# Altium PCB TestProj_DDR3.PcbDoc (part 1 of 2)
Units mil, origin at the board's own origin, x right, y up, seen from the top; angles counter-clockwise.
Board outline 6000 x 4000 mil, 4 copper layers (Component Side, Power Plane, Ground Plane, Solder Side), stack 51.034 mil thick; 26 components, 54 nets, 768 pads, 131 vias.
Unrouted connection lines stored in the file: 84.
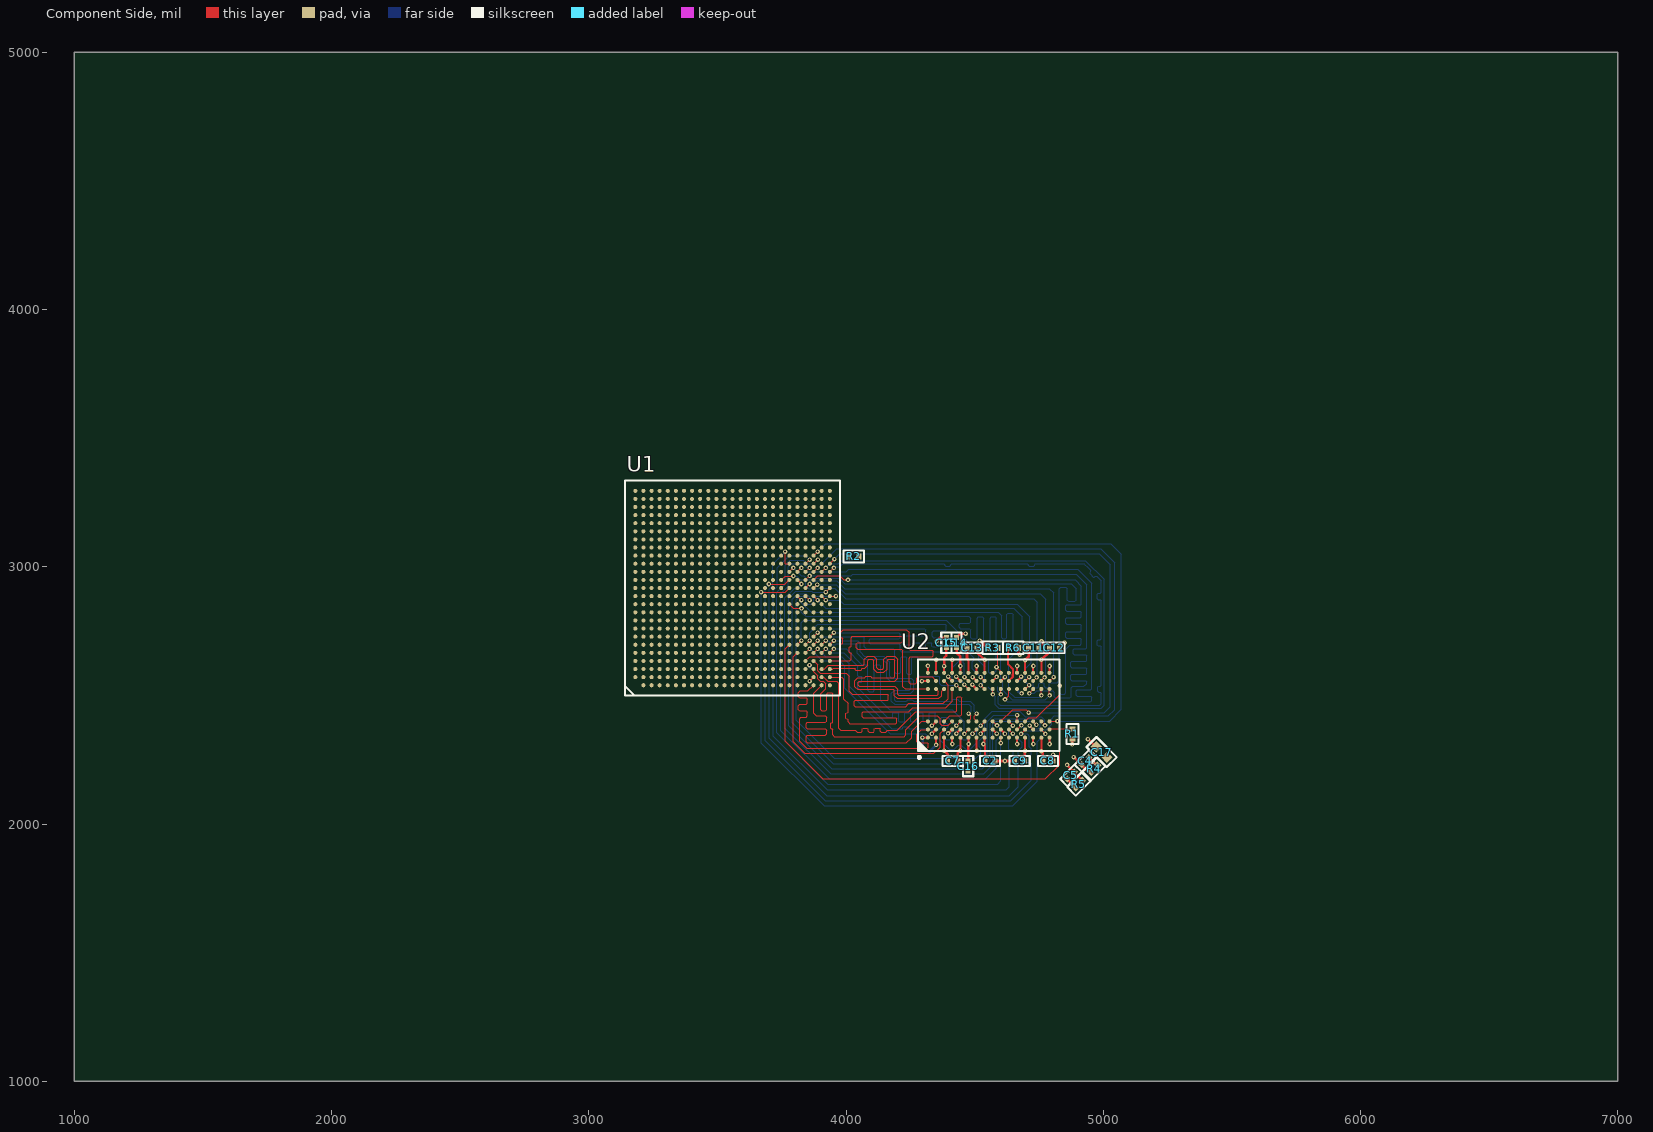
[diagram p0: Component Side view]
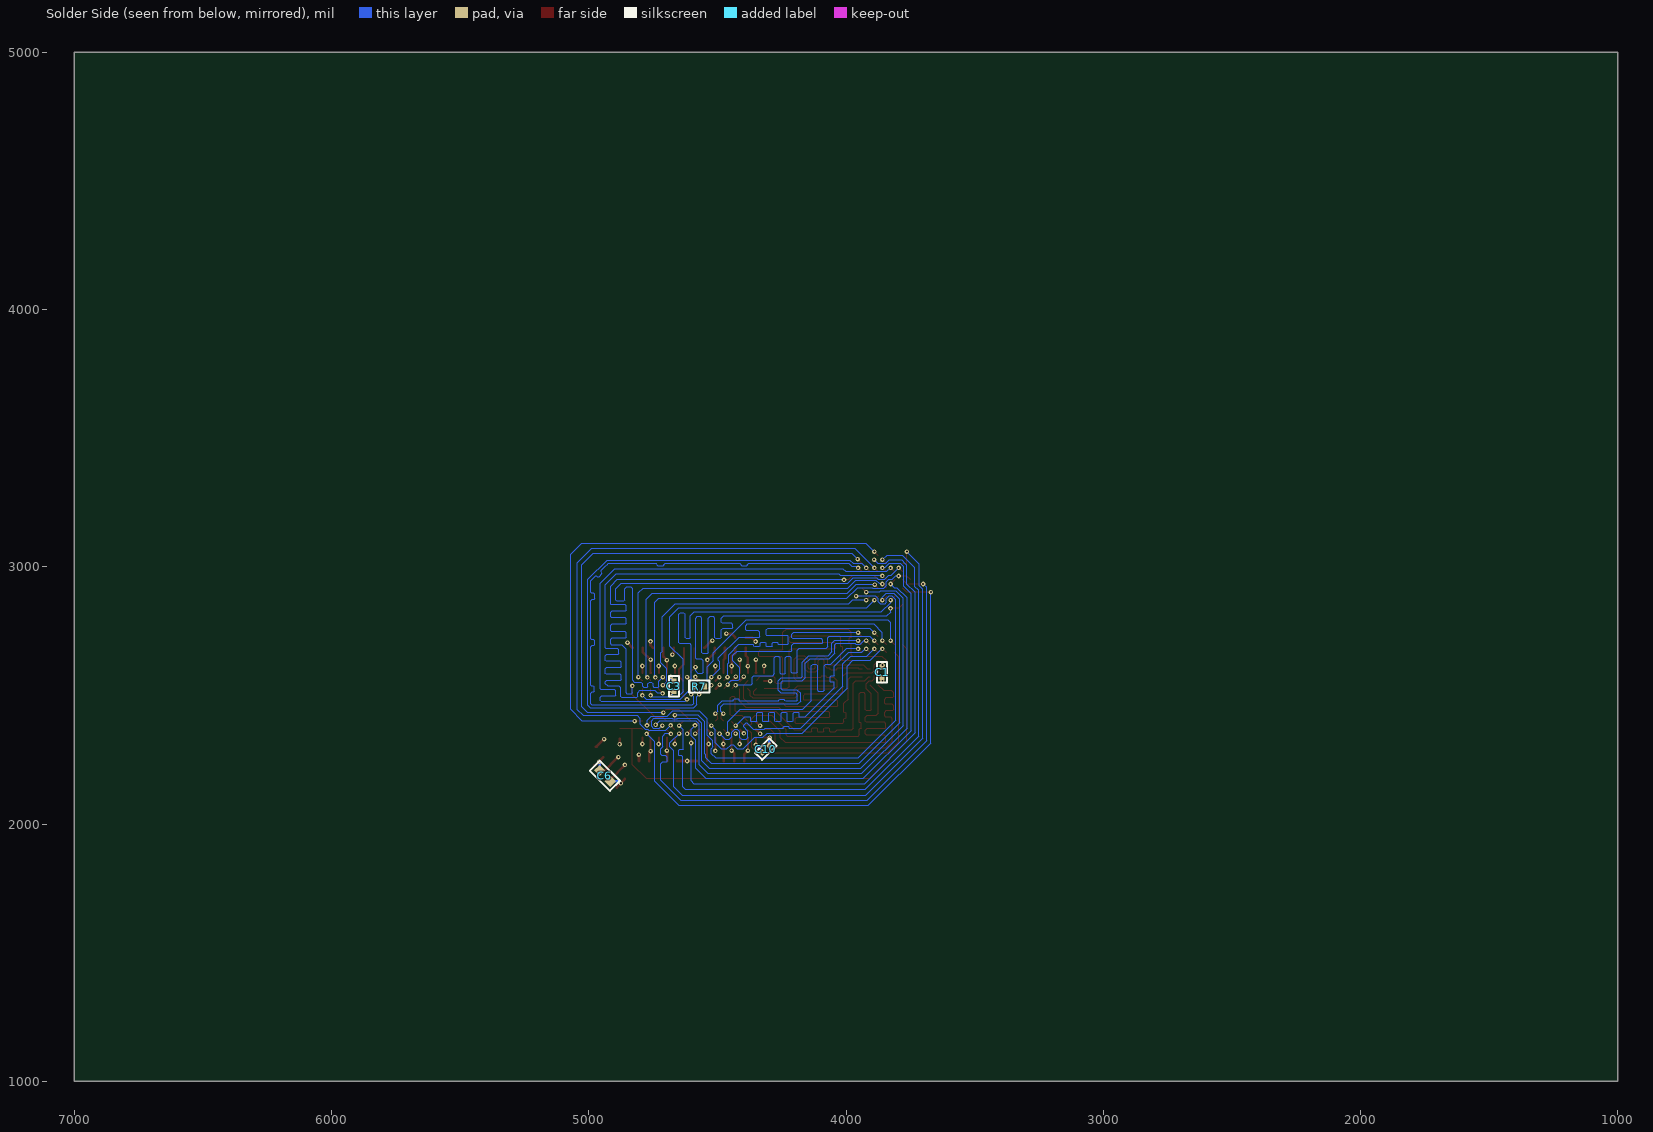
[diagram p1: Solder Side view, seen from below]
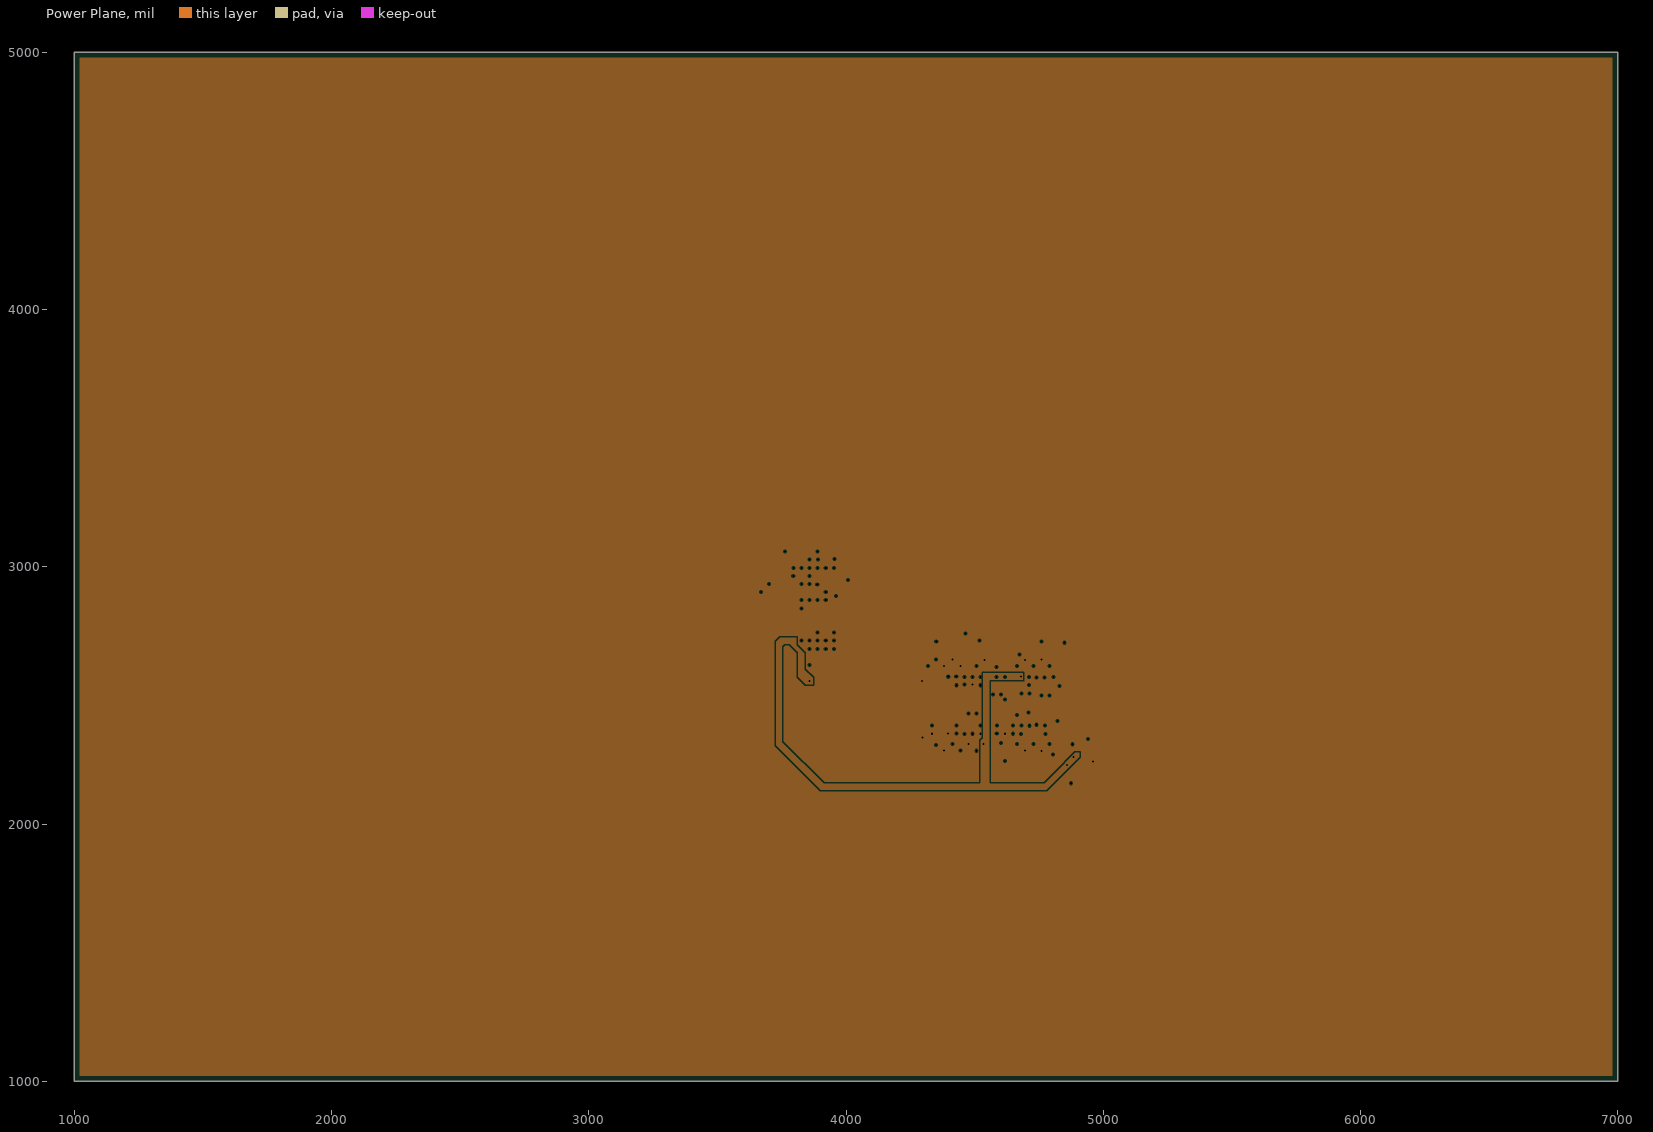
[diagram p2: Power Plane, clearances drawn from the general rule]
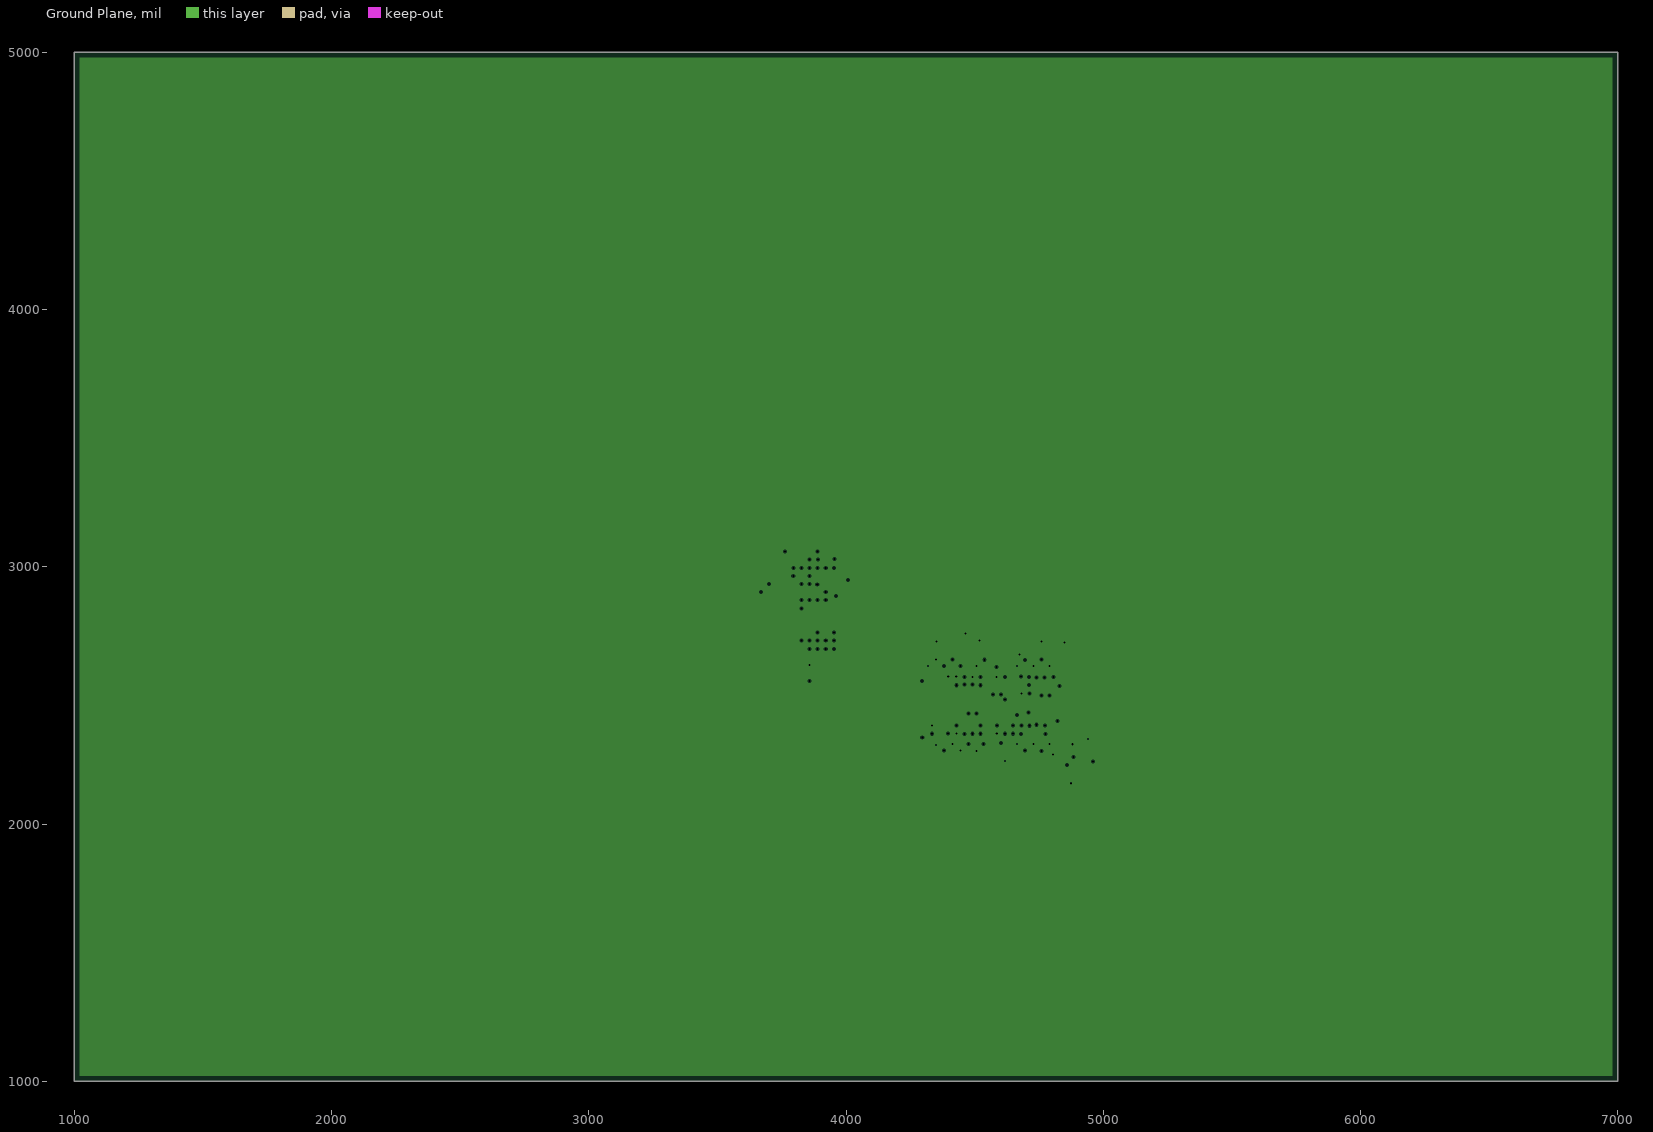
[diagram p3: Ground Plane, clearances drawn from the general rule]

## Layer stack, top to bottom
Top Solder: solder mask 0.4, Solder Resist, Dk 3.5
Component Side: signal copper 1.4
Dielectric 1: prepreg 2.7, 1*1080, Dk 4
Power Plane: plane copper 1.417, net +1V5_DDR
Dielectric 4: prepreg 2.7, 1*1080, Dk 4
Ground Plane: plane copper 1.417, net GND
Dielectric 3: core 40, FR-4, Dk 4.2
Solder Side: signal copper 1.4
Bottom Solder: solder mask 0.4, Solder Resist, Dk 3.5

## Board outline
1000,1000 7000,1000 7000,5000 1000,5000

## Design rules (kind name [scope] priority, off if disabled: settings)
Clearance [All] p1: gap=4.92 ignorepadtopadclearanceinfootprint=FALSE except(4.33: Track-Track Track-SMDPad Track-Via Via-Via)
DiffPairsRouting [InDifferentialPairClass('All Differential Pairs')] p1: maxlimit=8 minlimit=7 mostfreqgap=8 toplayer_minwidth=4 toplayer_maxwidth=4.3 toplayer_prefwidth=4.2 bottomlayer_minwidth=4 bottomlayer_maxwidth=4.3 bottomlayer_prefwidth=4.2 maxuncoupledlength=500
MatchedLengths MatchedLengths_DDR_CLOCKS_STROBES [InxSignalClass('ADDR_T_PP1') OR InxSignalClass('DATA_T_BL0') OR InxSignalClass('DATA_T_BL1')] p1: tolerance=1 checknetsindiffpair=TRUE checkdiffpairvsdiffpair=FALSE checkxsignals=FALSE checkothers=FALSE
MatchedLengths MatchedLengths_DATA_T_BL1 [InxSignalClass('DATA_T_BL1')] p2: tolerance=10 checknetsindiffpair=FALSE checkdiffpairvsdiffpair=TRUE checkxsignals=TRUE checkothers=TRUE
MatchedLengths MatchedLengths_DATA_T_BL0 [InxSignalClass('DATA_T_BL0')] p3: tolerance=10 checknetsindiffpair=FALSE checkdiffpairvsdiffpair=TRUE checkxsignals=TRUE checkothers=TRUE
MatchedLengths MatchedLengths_ADDR_T_PP1 [InxSignalClass('ADDR_T_PP1')] p4: tolerance=10 checknetsindiffpair=FALSE checkdiffpairvsdiffpair=TRUE checkxsignals=TRUE checkothers=TRUE
PlaneClearance [All] p1: clearance=3.94
PlaneConnect [All] p1: planeconnectstyle=Direct reliefexpansion=20 reliefentries=4 reliefconductorwidth=10 reliefairgap=10
PolygonConnect [All] p1: connectstyle=Relief reliefconductorwidth=10 reliefentries=4 polygonreliefangle="90 Angle" airgapwidth=10
RoutingCorners [All] p1: cornerstyle=45-Degree minsetback=20 maxsetback=100
RoutingTopology RoutingTopology_DDRAddressAndControls [InNetClass('DDR_AddressAndControls')] p2: topology=Daisy_Simple
RoutingVias [All] p1: holewidth=7.87 width=17.72 viastyle="Through Hole" minholewidth=7.87 minwidth=17.72 maxholewidth=9.84 maxwidth=19.68
SMDNeckDown [All] p1: percent=90.000
SolderMaskExpansion [All] p1: expansion=4
Width Microstrip [InNetClass('Microstrip_class')] p1: maxlimit=4.6 minlimit=4.4 preferedwidth=4.5 minimp=50.000000 maximp=50.000000 favimp=50.000000
Width [InNetClass('All Nets')] p2: maxlimit=10 minlimit=5 preferedwidth=10 toplayer_prefwidth=8 minimp=50.000000 maximp=50.000000 favimp=50.000000
26 further rules are at their usual default settings.

## Classes and differential pairs
net class Microstrip_class: DRAM_A0 DRAM_A1 DRAM_A2 DRAM_A3 DRAM_A4 DRAM_A5 DRAM_A6 DRAM_A7 DRAM_A8 DRAM_A9 DRAM_A10 DRAM_A11 DRAM_A12 DRAM_A13 DRAM_A14 DRAM_CAS_B DRAM_CS0_B DRAM_D0 DRAM_D1 DRAM_D2 DRAM_D3 DRAM_D4 DRAM_D5 DRAM_D6 DRAM_D7 DRAM_D8 DRAM_D9 DRAM_D10 DRAM_D11 DRAM_D12 DRAM_D13 DRAM_D14 DRAM_D15 DRAM_DQM0 DRAM_DQM1 DRAM_RAS_B DRAM_RESET_B DRAM_SDBA0 DRAM_SDBA1 DRAM_SDBA2 DRAM_SDCKE0 DRAM_SDODT0 DRAM_WE_B
net class DDR_AddressAndControls: DRAM_A0 DRAM_A1 DRAM_A2 DRAM_A3 DRAM_A4 DRAM_A5 DRAM_A6 DRAM_A7 DRAM_A8 DRAM_A9 DRAM_A10 DRAM_A11 DRAM_A12 DRAM_A13 DRAM_A14 DRAM_CAS_B DRAM_CLK0_N DRAM_CLK0_P DRAM_CS0_B DRAM_RAS_B DRAM_SDBA0 DRAM_SDBA1 DRAM_SDBA2 DRAM_SDODT0 DRAM_WE_B
net class DRAM_SDCLK: DRAM_CLK0_N DRAM_CLK0_P
net class DRAM_OTHERS: ZQPAD
net class DRAM_D[15..0]: DRAM_D0 DRAM_D1 DRAM_D2 DRAM_D3 DRAM_D4 DRAM_D5 DRAM_D6 DRAM_D7 DRAM_D8 DRAM_D9 DRAM_D10 DRAM_D11 DRAM_D12 DRAM_D13 DRAM_D14 DRAM_D15
net class DRAM_BANK1: DRAM_D8 DRAM_D9 DRAM_D10 DRAM_D11 DRAM_D12 DRAM_D13 DRAM_D14 DRAM_D15 DRAM_DQM1 DRAM_DQS1_N DRAM_DQS1_P
net class DRAM_BANK0: DRAM_D0 DRAM_D1 DRAM_D2 DRAM_D3 DRAM_D4 DRAM_D5 DRAM_D6 DRAM_D7 DRAM_DQM0 DRAM_DQS0_N DRAM_DQS0_P
net class DRAM_ADDR_CTRL: DRAM_A0 DRAM_A1 DRAM_A2 DRAM_A3 DRAM_A4 DRAM_A5 DRAM_A6 DRAM_A7 DRAM_A8 DRAM_A9 DRAM_A10 DRAM_A11 DRAM_A12 DRAM_A13 DRAM_A14 DRAM_CAS_B DRAM_CS0_B DRAM_RAS_B DRAM_RESET_B DRAM_SDBA0 DRAM_SDBA1 DRAM_SDBA2 DRAM_SDCKE0 DRAM_SDODT0 DRAM_WE_B
net class DRAM_A[14..0]: DRAM_A0 DRAM_A1 DRAM_A2 DRAM_A3 DRAM_A4 DRAM_A5 DRAM_A6 DRAM_A7 DRAM_A8 DRAM_A9 DRAM_A10 DRAM_A11 DRAM_A12 DRAM_A13 DRAM_A14
net class DIFF100: DRAM_CLK0_N DRAM_CLK0_P DRAM_DQS0_N DRAM_DQS0_P DRAM_DQS1_N DRAM_DQS1_P
differential pair DRAM_DQS1: +DRAM_DQS1_P -DRAM_DQS1_N
differential pair DRAM_DQS0: +DRAM_DQS0_P -DRAM_DQS0_N
differential pair DRAM_CLK0: +DRAM_CLK0_P -DRAM_CLK0_N

## Components (designator, comment, footprint, x,y, rotation, side; value= is the part's Value field where it differs from the comment)
C1 "100n" C0402 3860,2590 r90 bottom value=100nF
C2 "220n" C0402 4560,2245 r0 top value=220nF
C3 "220n" C0402 4669.29,2535.43 r270 bottom value=220nF
C4 "100n" C0402 4930,2245 r225 top value=100nF
C5 "100n" C0402 4873.92,2188.92 r225 top value=100nF
C6 "10u" C0603 4937.16,2187.16 r225 bottom value=10µF
C7 "220n" C0402 4414.69,2245 r0 top value=220nF
C8 "220n" C0402 4785,2245 r0 top value=220nF
C9 "220n" C0402 4675,2245 r180 top value=220nF
C10 "220n" C0402 4311.94,2291.08 r315 bottom value=220nF
C11 "220n" C0402 4730,2685 r0 top value=220nF
C12 "220n" C0402 4810,2685 r0 top value=220nF
C13 "220n" C0402 4490,2685 r180 top value=220nF
C14 "220n" C0402 4430,2705 r90 top value=220nF
C15 "220n" C0402 4390,2705 r90 top value=220nF
C16 "220n" C0402 4475,2225 r270 top value=220nF
C17 "22u" C0603 4993.3,2279.7 r135 top
R1 "10k" R0402 4880,2350 r90 top
R2 "240R" R0402 4030,3040 r0 top
R3 "10k" R0402 4570.31,2685 r0 top
R4 "240R" R0402 4965,2215 r45 top
R5 "240R" R0402 4905,2155 r45 top
R6 "240R" R0402 4650,2685 r180 top
R7 "200R" R0402 4570,2534 r180 bottom
U1 "MCIMX6Q5EYM10AE" PBGA624 3559.06,2917.32 r90 top locked
U2 "MT41J256M16HA-107" MICT-HA-96 4554.57,2461.84 r90 top locked

## Footprints (in the part's own frame and the unit in brackets; to place one, negate y for a bottom-side part, rotate by r counter-clockwise, add the part's x,y. Pads: shape width x height; smd on the part's side, far side on the other; paste and mask are expansions set on the pad)
C0402 [mm]
  rect 0.5x0.5 smd: 1(-0.5,0) 2(0.5,0)
  silkscreen extent -1,-0.5 1,0.5, body extent -0.5,-0.25 0.5,0.25, height 0.56
C0603 [mm]
  rect 0.8x0.8 smd: 1(-0.75,0) 2(0.75,0)
  silkscreen extent -1.4,-0.7 1.4,0.7, body extent -0.8,-0.42 0.8,0.44, height 0.95
MICT-HA-96 [mm] "BGA, 96-Balls, Body 14x9mm, Pitch 0.8mm"
  round 0.4 smd: A1(-3.2,6) A2(-2.4,6) A3(-1.6,6) A7(1.6,6) A8(2.4,6) A9(3.2,6) B1(-3.2,5.2) B2(-2.4,5.2) B3(-1.6,5.2) B7(1.6,5.2) B8(2.4,5.2) B9(3.2,5.2) C1(-3.2,4.4) C2(-2.4,4.4) C3(-1.6,4.4) C7(1.6,4.4) C8(2.4,4.4) C9(3.2,4.4) D1(-3.2,3.6) D2(-2.4,3.6) D3(-1.6,3.6) D7(1.6,3.6) D8(2.4,3.6) D9(3.2,3.6) E1(-3.2,2.8) E2(-2.4,2.8) E3(-1.6,2.8) E7(1.6,2.8) E8(2.4,2.8) E9(3.2,2.8) F1(-3.2,2) F2(-2.4,2) F3(-1.6,2) F7(1.6,2) F8(2.4,2) F9(3.2,2) G1(-3.2,1.2) G2(-2.4,1.2) G3(-1.6,1.2) G7(1.6,1.2) G8(2.4,1.2) G9(3.2,1.2) H1(-3.2,0.4) H2(-2.4,0.4) H3(-1.6,0.4) H7(1.6,0.4) H8(2.4,0.4) H9(3.2,0.4) J1(-3.2,-0.4) J2(-2.4,-0.4) J3(-1.6,-0.4) J7(1.6,-0.4) J8(2.4,-0.4) J9(3.2,-0.4) K1(-3.2,-1.2) K2(-2.4,-1.2) K3(-1.6,-1.2) K7(1.6,-1.2) K8(2.4,-1.2) K9(3.2,-1.2) L1(-3.2,-2) L2(-2.4,-2) L3(-1.6,-2) L7(1.6,-2) L8(2.4,-2) L9(3.2,-2) M1(-3.2,-2.8) M2(-2.4,-2.8) M3(-1.6,-2.8) M7(1.6,-2.8) M8(2.4,-2.8) M9(3.2,-2.8) N1(-3.2,-3.6) N2(-2.4,-3.6) N3(-1.6,-3.6) N7(1.6,-3.6) N8(2.4,-3.6) N9(3.2,-3.6) P1(-3.2,-4.4) P2(-2.4,-4.4) P3(-1.6,-4.4) P7(1.6,-4.4) P8(2.4,-4.4) P9(3.2,-4.4) R1(-3.2,-5.2) R2(-2.4,-5.2) R3(-1.6,-5.2) R7(1.6,-5.2) R8(2.4,-5.2) R9(3.2,-5.2) T1(-3.2,-6) T2(-2.4,-6) T3(-1.6,-6) T7(1.6,-6) T8(2.4,-6) T9(3.2,-6)
  silkscreen extent -5.27,-7 4.5,7, body extent -4.5,-7 4.5,7, height 0.1
PBGA624 [mm]
  round 0.4 smd mask+0.05: A2(-8.8,9.6) A3(-8,9.6) A4(-7.2,9.6) A5(-6.4,9.6) A6(-5.6,9.6) A7(-4.8,9.6) A8(-4,9.6) A9(-3.2,9.6) A10(-2.4,9.6) A11(-1.6,9.6) A12(-0.8,9.6) A13(0,9.6) A14(0.8,9.6) A15(1.6,9.6) A16(2.4,9.6) A17(3.2,9.6) A18(4,9.6) A19(4.8,9.6) A20(5.6,9.6) A21(6.4,9.6) A22(7.2,9.6) A23(8,9.6) A24(8.8,9.6) A25(9.6,9.6) AA1(-9.6,-6.4) AA2(-8.8,-6.4) AA3(-8,-6.4) AA4(-7.2,-6.4) AA5(-6.4,-6.4) AA6(-5.6,-6.4) AA7(-4.8,-6.4) AA8(-4,-6.4) AA9(-3.2,-6.4) AA10(-2.4,-6.4) AA11(-1.6,-6.4) AA12(-0.8,-6.4) AA13(0,-6.4) AA14(0.8,-6.4) AA15(1.6,-6.4) AA16(2.4,-6.4) AA17(3.2,-6.4) AA18(4,-6.4) AA19(4.8,-6.4) AA20(5.6,-6.4) AA21(6.4,-6.4) AA22(7.2,-6.4) AA23(8,-6.4) AA24(8.8,-6.4) AA25(9.6,-6.4) AB1(-9.6,-7.2) AB2(-8.8,-7.2) AB3(-8,-7.2) AB4(-7.2,-7.2) AB5(-6.4,-7.2) AB6(-5.6,-7.2) AB7(-4.8,-7.2) AB8(-4,-7.2) AB9(-3.2,-7.2) AB10(-2.4,-7.2) AB11(-1.6,-7.2) AB12(-0.8,-7.2) AB13(0,-7.2) AB14(0.8,-7.2) AB15(1.6,-7.2) AB16(2.4,-7.2) AB17(3.2,-7.2) AB18(4,-7.2) AB19(4.8,-7.2) AB20(5.6,-7.2) AB21(6.4,-7.2) AB22(7.2,-7.2) AB23(8,-7.2) AB24(8.8,-7.2) AB25(9.6,-7.2) AC1(-9.6,-8) AC2(-8.8,-8) AC3(-8,-8) AC4(-7.2,-8) AC5(-6.4,-8) AC6(-5.6,-8) AC7(-4.8,-8) AC8(-4,-8) AC9(-3.2,-8) AC10(-2.4,-8) AC11(-1.6,-8) AC12(-0.8,-8) AC13(0,-8) AC14(0.8,-8) AC15(1.6,-8) AC16(2.4,-8) AC17(3.2,-8) AC18(4,-8) AC19(4.8,-8) AC20(5.6,-8) AC21(6.4,-8) AC22(7.2,-8) AC23(8,-8) AC24(8.8,-8) AC25(9.6,-8) AD1(-9.6,-8.8) AD2(-8.8,-8.8) AD3(-8,-8.8) AD4(-7.2,-8.8) AD5(-6.4,-8.8) AD6(-5.6,-8.8) AD7(-4.8,-8.8) AD8(-4,-8.8) AD9(-3.2,-8.8) AD10(-2.4,-8.8) AD11(-1.6,-8.8) AD12(-0.8,-8.8) AD13(0,-8.8) AD14(0.8,-8.8) AD15(1.6,-8.8) AD16(2.4,-8.8) AD17(3.2,-8.8) AD18(4,-8.8) AD19(4.8,-8.8) AD20(5.6,-8.8) AD21(6.4,-8.8) AD22(7.2,-8.8) AD23(8,-8.8) AD24(8.8,-8.8) AD25(9.6,-8.8) AE1(-9.6,-9.6) AE2(-8.8,-9.6) AE3(-8,-9.6) AE4(-7.2,-9.6) AE5(-6.4,-9.6) AE6(-5.6,-9.6) AE7(-4.8,-9.6) AE8(-4,-9.6) AE9(-3.2,-9.6) AE10(-2.4,-9.6) AE11(-1.6,-9.6) AE12(-0.8,-9.6) AE13(0,-9.6) AE14(0.8,-9.6) AE15(1.6,-9.6) AE16(2.4,-9.6) AE17(3.2,-9.6) AE18(4,-9.6) AE19(4.8,-9.6) AE20(5.6,-9.6) AE21(6.4,-9.6) AE22(7.2,-9.6) AE23(8,-9.6) AE24(8.8,-9.6) AE25(9.6,-9.6) B1(-9.6,8.8) B2(-8.8,8.8) B3(-8,8.8) B4(-7.2,8.8) B5(-6.4,8.8) B6(-5.6,8.8) B7(-4.8,8.8) B8(-4,8.8) B9(-3.2,8.8) B10(-2.4,8.8) B11(-1.6,8.8) B12(-0.8,8.8) B13(0,8.8) B14(0.8,8.8) B15(1.6,8.8) B16(2.4,8.8) B17(3.2,8.8) B18(4,8.8) B19(4.8,8.8) B20(5.6,8.8) B21(6.4,8.8) B22(7.2,8.8) B23(8,8.8) B24(8.8,8.8) B25(9.6,8.8) C1(-9.6,8) C2(-8.8,8) C3(-8,8) C4(-7.2,8) C5(-6.4,8) C6(-5.6,8) C7(-4.8,8) C8(-4,8) C9(-3.2,8) C10(-2.4,8) C11(-1.6,8) C12(-0.8,8) C13(0,8) C14(0.8,8) C15(1.6,8) C16(2.4,8) C17(3.2,8) C18(4,8) C19(4.8,8) C20(5.6,8) C21(6.4,8) C22(7.2,8) C23(8,8) C24(8.8,8) C25(9.6,8) D1(-9.6,7.2) D2(-8.8,7.2) D3(-8,7.2) D4(-7.2,7.2) D5(-6.4,7.2) D6(-5.6,7.2) D7(-4.8,7.2) D8(-4,7.2) D9(-3.2,7.2) D10(-2.4,7.2) D11(-1.6,7.2) D12(-0.8,7.2) D13(0,7.2) D14(0.8,7.2) D15(1.6,7.2) D16(2.4,7.2) D17(3.2,7.2) D18(4,7.2) D19(4.8,7.2) D20(5.6,7.2) D21(6.4,7.2) D22(7.2,7.2) D23(8,7.2) D24(8.8,7.2) D25(9.6,7.2) E1(-9.6,6.4) E2(-8.8,6.4) E3(-8,6.4) E4(-7.2,6.4) E5(-6.4,6.4) E6(-5.6,6.4) E7(-4.8,6.4) E8(-4,6.4) E9(-3.2,6.4) E10(-2.4,6.4) E11(-1.6,6.4) E12(-0.8,6.4) E13(0,6.4) E14(0.8,6.4) E15(1.6,6.4) E16(2.4,6.4) E17(3.2,6.4) E18(4,6.4) E19(4.8,6.4) E20(5.6,6.4) E21(6.4,6.4) E22(7.2,6.4) E23(8,6.4) E24(8.8,6.4) E25(9.6,6.4) F1(-9.6,5.6) F2(-8.8,5.6) F3(-8,5.6) F4(-7.2,5.6) F5(-6.4,5.6) F6(-5.6,5.6) F7(-4.8,5.6) F8(-4,5.6) F9(-3.2,5.6) F10(-2.4,5.6) F11(-1.6,5.6) F12(-0.8,5.6) F13(0,5.6) F14(0.8,5.6) F15(1.6,5.6) F16(2.4,5.6) F17(3.2,5.6) F18(4,5.6) F19(4.8,5.6) F20(5.6,5.6) F21(6.4,5.6) F22(7.2,5.6) F23(8,5.6) F24(8.8,5.6) F25(9.6,5.6) G1(-9.6,4.8) G2(-8.8,4.8) G3(-8,4.8) G4(-7.2,4.8) G5(-6.4,4.8) G6(-5.6,4.8) G7(-4.8,4.8) G8(-4,4.8) G9(-3.2,4.8) G10(-2.4,4.8) G11(-1.6,4.8) G12(-0.8,4.8) G13(0,4.8) G14(0.8,4.8) G15(1.6,4.8) G16(2.4,4.8) G17(3.2,4.8) G18(4,4.8) G19(4.8,4.8) G20(5.6,4.8) G21(6.4,4.8) G22(7.2,4.8) G23(8,4.8) G24(8.8,4.8) G25(9.6,4.8) H1(-9.6,4) H2(-8.8,4) H3(-8,4) H4(-7.2,4) H5(-6.4,4) H6(-5.6,4) H7(-4.8,4) H8(-4,4) H9(-3.2,4) H10(-2.4,4) H11(-1.6,4) H12(-0.8,4) H13(0,4) H14(0.8,4) H15(1.6,4) H16(2.4,4) H17(3.2,4) H18(4,4) H19(4.8,4) H20(5.6,4) H21(6.4,4) H22(7.2,4) H23(8,4) H24(8.8,4) H25(9.6,4) J1(-9.6,3.2) J2(-8.8,3.2) J3(-8,3.2) J4(-7.2,3.2) J5(-6.4,3.2) J6(-5.6,3.2) J7(-4.8,3.2) J8(-4,3.2) J9(-3.2,3.2) J10(-2.4,3.2) J11(-1.6,3.2) J12(-0.8,3.2) J13(0,3.2) J14(0.8,3.2) J15(1.6,3.2) J16(2.4,3.2) J17(3.2,3.2) J18(4,3.2) J19(4.8,3.2) J20(5.6,3.2) J21(6.4,3.2) J22(7.2,3.2) J23(8,3.2) J24(8.8,3.2) J25(9.6,3.2) K1(-9.6,2.4) K2(-8.8,2.4) K3(-8,2.4) K4(-7.2,2.4) K5(-6.4,2.4) K6(-5.6,2.4) K7(-4.8,2.4) K8(-4,2.4) K9(-3.2,2.4) K10(-2.4,2.4) K11(-1.6,2.4) K12(-0.8,2.4) K13(0,2.4) K14(0.8,2.4) K15(1.6,2.4) K16(2.4,2.4) K17(3.2,2.4) K18(4,2.4) K19(4.8,2.4) K20(5.6,2.4) K21(6.4,2.4) K22(7.2,2.4) K23(8,2.4) K24(8.8,2.4) K25(9.6,2.4) L1(-9.6,1.6) L2(-8.8,1.6) L3(-8,1.6) L4(-7.2,1.6) L5(-6.4,1.6) L6(-5.6,1.6) L7(-4.8,1.6) L8(-4,1.6) L9(-3.2,1.6) L10(-2.4,1.6) L11(-1.6,1.6) L12(-0.8,1.6) L13(0,1.6) L14(0.8,1.6) L15(1.6,1.6) L16(2.4,1.6) L17(3.2,1.6) L18(4,1.6) L19(4.8,1.6) L20(5.6,1.6) L21(6.4,1.6) L22(7.2,1.6) L23(8,1.6) L24(8.8,1.6) L25(9.6,1.6) M1(-9.6,0.8) M2(-8.8,0.8) M3(-8,0.8) M4(-7.2,0.8) M5(-6.4,0.8) M6(-5.6,0.8) M7(-4.8,0.8) M8(-4,0.8) M9(-3.2,0.8) M10(-2.4,0.8) M11(-1.6,0.8) M12(-0.8,0.8) M13(0,0.8) M14(0.8,0.8) M15(1.6,0.8) M16(2.4,0.8) M17(3.2,0.8) M18(4,0.8) M19(4.8,0.8) M20(5.6,0.8) M21(6.4,0.8) M22(7.2,0.8) M23(8,0.8) M24(8.8,0.8) M25(9.6,0.8) N1(-9.6,0) N2(-8.8,0) N3(-8,0) N4(-7.2,0) N5(-6.4,0) N6(-5.6,0) N7(-4.8,0) N8(-4,0) N9(-3.2,0) N10(-2.4,0) N11(-1.6,0) N12(-0.8,0) N13(0,0) N14(0.8,0) N15(1.6,0) N16(2.4,0) N17(3.2,0) N18(4,0) N19(4.8,0) N20(5.6,0) N21(6.4,0) N22(7.2,0) N23(8,0) N24(8.8,0) N25(9.6,0) P1(-9.6,-0.8) P2(-8.8,-0.8) P3(-8,-0.8) P4(-7.2,-0.8) P5(-6.4,-0.8) P6(-5.6,-0.8) P7(-4.8,-0.8) P8(-4,-0.8) P9(-3.2,-0.8) P10(-2.4,-0.8) P11(-1.6,-0.8) P12(-0.8,-0.8) P13(0,-0.8) P14(0.8,-0.8) P15(1.6,-0.8) P16(2.4,-0.8) P17(3.2,-0.8) P18(4,-0.8) P19(4.8,-0.8) P20(5.6,-0.8) P21(6.4,-0.8) P22(7.2,-0.8) P23(8,-0.8) P24(8.8,-0.8) P25(9.6,-0.8) R1(-9.6,-1.6) R2(-8.8,-1.6) R3(-8,-1.6) R4(-7.2,-1.6) R5(-6.4,-1.6) R6(-5.6,-1.6) R7(-4.8,-1.6) R8(-4,-1.6) R9(-3.2,-1.6) R10(-2.4,-1.6) R11(-1.6,-1.6) R12(-0.8,-1.6) R13(0,-1.6) R14(0.8,-1.6) R15(1.6,-1.6) R16(2.4,-1.6) R17(3.2,-1.6) R18(4,-1.6) R19(4.8,-1.6) R20(5.6,-1.6) R21(6.4,-1.6) R22(7.2,-1.6) R23(8,-1.6) R24(8.8,-1.6) R25(9.6,-1.6) T1(-9.6,-2.4) T2(-8.8,-2.4) T3(-8,-2.4) T4(-7.2,-2.4) T5(-6.4,-2.4) T6(-5.6,-2.4) T7(-4.8,-2.4) T8(-4,-2.4) T9(-3.2,-2.4) T10(-2.4,-2.4) T11(-1.6,-2.4) T12(-0.8,-2.4) T13(0,-2.4) T14(0.8,-2.4) T15(1.6,-2.4) T16(2.4,-2.4) T17(3.2,-2.4) T18(4,-2.4) T19(4.8,-2.4) T20(5.6,-2.4) T21(6.4,-2.4) T22(7.2,-2.4) T23(8,-2.4) T24(8.8,-2.4) T25(9.6,-2.4) U1(-9.6,-3.2) U2(-8.8,-3.2) U3(-8,-3.2) U4(-7.2,-3.2) U5(-6.4,-3.2) U6(-5.6,-3.2) U7(-4.8,-3.2) U8(-4,-3.2) U9(-3.2,-3.2) U10(-2.4,-3.2) U11(-1.6,-3.2) U12(-0.8,-3.2) U13(0,-3.2) U14(0.8,-3.2) U15(1.6,-3.2) U16(2.4,-3.2) U17(3.2,-3.2) U18(4,-3.2) U19(4.8,-3.2) U20(5.6,-3.2) U21(6.4,-3.2) U22(7.2,-3.2) U23(8,-3.2) U24(8.8,-3.2) U25(9.6,-3.2) V1(-9.6,-4) V2(-8.8,-4) V3(-8,-4) V4(-7.2,-4) V5(-6.4,-4) V6(-5.6,-4) V7(-4.8,-4) V8(-4,-4) V9(-3.2,-4) V10(-2.4,-4) V11(-1.6,-4) V12(-0.8,-4) V13(0,-4) V14(0.8,-4) V15(1.6,-4) V16(2.4,-4) V17(3.2,-4) V18(4,-4) V19(4.8,-4) V20(5.6,-4) V21(6.4,-4) V22(7.2,-4) V23(8,-4) V24(8.8,-4) V25(9.6,-4) W1(-9.6,-4.8) W2(-8.8,-4.8) W3(-8,-4.8) W4(-7.2,-4.8) W5(-6.4,-4.8) W6(-5.6,-4.8) W7(-4.8,-4.8) W8(-4,-4.8) W9(-3.2,-4.8) W10(-2.4,-4.8) W11(-1.6,-4.8) W12(-0.8,-4.8) W13(0,-4.8) W14(0.8,-4.8) W15(1.6,-4.8) W16(2.4,-4.8) W17(3.2,-4.8) W18(4,-4.8) W19(4.8,-4.8) W20(5.6,-4.8) W21(6.4,-4.8) W22(7.2,-4.8) W23(8,-4.8) W24(8.8,-4.8) W25(9.6,-4.8) Y1(-9.6,-5.6) Y2(-8.8,-5.6) Y3(-8,-5.6) Y4(-7.2,-5.6) Y5(-6.4,-5.6) Y6(-5.6,-5.6) Y7(-4.8,-5.6) Y8(-4,-5.6) Y9(-3.2,-5.6) Y10(-2.4,-5.6) Y11(-1.6,-5.6) Y12(-0.8,-5.6) Y13(0,-5.6) Y14(0.8,-5.6) Y15(1.6,-5.6) Y16(2.4,-5.6) Y17(3.2,-5.6) Y18(4,-5.6) Y19(4.8,-5.6) Y20(5.6,-5.6) Y21(6.4,-5.6) Y22(7.2,-5.6) Y23(8,-5.6) Y24(8.8,-5.6) Y25(9.6,-5.6)
  silkscreen extent -10.6,-10.6 10.6,10.6, body extent -10.5,-10.5 10.5,10.5, height 1.1
R0402 [mm]
  rect 0.5x0.6 smd: 1(-0.5,0) 2(0.5,0)
  silkscreen extent -1,-0.6 1,0.6, body extent -0.5,-0.25 0.5,0.25, height 0.4

## Part data
C1 C4 C5: library part C1005X5R1H104K, "CAP CER .10UF 50V X5R 10% 0402", Capacitance=0.1µF, Manufacturer="TDK Corporation", Operating Temperature="-55°C ~ 85°C", Package / Case="0402 (1005 Metric)", Ratings=-, Supplier Part Number=445-5942-1-ND, Temperature Coefficient=X5R, Tolerance=±10%, Voltage - Rated=50V, .Checked PCB=used, .Checked SCH=used, Applications="General Purpose", Category=Capacitors, ComponentLink1Description=http://www.tdk.co.jp/tefe02/e412_c.pdf, ComponentLink1URL=http://www.tdk.co.jp/tefe02/e412_c.pdf, Features=-, Height - Seated (Max)=-, Lead Spacing=-, Lead Style=-, Manufacturer Part Number=C1005X5R1H104K, Mounting Type="Surface Mount, MLCC", Packaging="Cut Tape (CT)", Price 1k [$]=0.02340, Pricing 1="1=0.27, 10=0.18, 100=0.072, 250=0.05176, 500=0.0369, 1000=0.027 (USD)", RoHS="RoHS Compliant", Size / Dimension="0.039\" L x 0.020\" W (1.00mm x 0.50mm)", Stock 1=106926, Supplier=Digikey, Supplier 1=Digi-Key, Supplier Part Number 1=445-5942-1-ND, Thickness (Max)="0.022\" (0.55mm)"
C2 C3 C7 C8 C9 C10 C11 C12 C13 C14 C15 C16: library part C1005X5R1E224M, "CAP CER .22UF 25V X5R 20% 0402", Capacitance=0.22µF, Manufacturer="TDK Corporation", Operating Temperature="-55°C ~ 85°C", Package / Case="0402 (1005 Metric)", Ratings=-, Supplier Part Number=445-5945-1-ND, Temperature Coefficient=X5R, Tolerance=±20%, Voltage - Rated=25V, .Checked PCB=used, .Checked SCH=used, Applications="General Purpose", Category=Capacitors, ComponentLink1Description=http://www.tdk.co.jp/tefe02/e412_c.pdf, ComponentLink1URL=http://www.tdk.co.jp/tefe02/e412_c.pdf, Features=-, Height - Seated (Max)=-, Lead Spacing=-, Lead Style=-, Manufacturer Part Number=C1005X5R1E224M, Mounting Type="Surface Mount, MLCC", Packaging="Cut Tape (CT)", Price 1k [$]=0.02600, Pricing 1="1=0.3, 10=0.2, 100=0.08, 250=0.05752, 500=0.041, 1000=0.03 (USD)", RoHS="RoHS Compliant", Size / Dimension="0.039\" L x 0.020\" W (1.00mm x 0.50mm)", Stock 1=54593, Supplier=Digikey, Supplier 1=Digi-Key, Supplier Part Number 1=445-5945-1-ND, Thickness (Max)="0.022\" (0.55mm)"
C6: library part C1608X5R0J106M, "CAP CER 10UF 6.3V X5R 20% 0603", Capacitance=10µF, Manufacturer="TDK Corporation", Operating Temperature="-55°C ~ 85°C", Package / Case="0603 (1608 Metric)", Ratings=-, Supplier Part Number=445-4112-1-ND, Temperature Coefficient=X5R, Tolerance=±20%, Voltage - Rated=6.3V, .Checked PCB=used, .Checked SCH=used, Applications="General Purpose", Category=Capacitors, ComponentLink1Description=http://www.tdk.com/pdf/general_B11.pdf, ComponentLink1URL=http://www.tdk.com/pdf/general_B11.pdf, Features="Low ESR", Height - Seated (Max)=-, Lead Spacing=-, Lead Style=-, Manufacturer Part Number=C1608X5R0J106M, Mounting Type="Surface Mount, MLCC", Packaging="Cut Tape (CT)", Price 1k [$]=0.08580, Pricing 1="1=0.46, 10=0.363, 100=0.1898, 250=0.14024, 500=0.1089, 1000=0.0858 (USD)", RoHS="RoHS Compliant", Size / Dimension="0.063\" L x 0.031\" W (1.60mm x 0.80mm)", Stock 1=48157, Supplier=Digikey, Supplier 1=Digi-Key, Supplier Part Number 1=445-4112-1-ND, Thickness (Max)="0.037\" (0.95mm)"
C17: library part GRM188R60G226MEA0L, "CAP CER 22UF 4V 20% X5R 0603", Capacitance=22µF, Manufacturer="Murata Electronics North America", Operating Temperature="-55°C ~ 85°C", Package / Case="0603 (1608 Metric)", Ratings=-, Supplier Part Number 1=490-5526-1-ND, Temperature Coefficient=X5R, Tolerance=±20%, Voltage - Rated=4V, .Checked PCB="RF, used by MM", .Checked SCH="MM, checked by RF", .Creator=MM, Applications="General Purpose", Category=Capacitors, ComponentLink1Description=http://www.murata.com/products/catalog/pdf/c02e.pdf, ComponentLink1URL=http://www.murata.com/products/catalog/pdf/c02e.pdf, Features=-, Height - Seated (Max)=-, Lead Spacing=-, Lead Style=-, Manufacturer Part Number=GRM188R60G226MEA0L, Mounting Type="Surface Mount, MLCC", Packaging="Cut Tape (CT)", Pricing 1="1=0.79, 10=0.663, 50=0.4752, 100=0.4158, 250=0.32672, 500=0.297, 1000=0.2376 (USD)", RoHS="RoHS Compliant", Size / Dimension="0.063\" L x 0.031\" W (1.60mm x 0.80mm)", Stock 1=5760, Supplier 1=Digi-Key, Thickness (Max)="0.035\" (0.90mm)"
R1 R3: library part RC0402FR-0710KL, "RES 10.0K OHM 1/16W 1% 0402 SMD", Manufacturer=Yageo, Package / Case="0402 (1005 Metric)", Power (Watts)="0.063W, 1/16W", Resistance (Ohms)=10K, Supplier Part Number=311-10.0KLRCT-ND, Temperature Coefficient=±100ppm/°C, Tolerance=±1%, .Checked PCB=used, .Checked SCH=used, Category=Resistors, ComponentLink1Description=http://www.yageo.com/documents/recent/PYu-RC0402_51_RoHS_L_6.pdf, ComponentLink1URL=http://www.yageo.com/documents/recent/PYu-RC0402_51_RoHS_L_6.pdf, Composition="Thick Film", Features=-, Height="0.016\" (0.40mm)", Manufacturer Part Number=RC0402FR-0710KL, Number of Terminations=2, Packaging="Cut Tape (CT)", Price 1k [$]=0.01421, Pricing 1="10=0.014, 50=0.0104, 100=0.0079, 250=0.00584, 500=0.00432, 1000=0.00288 (USD)", RoHS="RoHS Compliant", Size / Dimension="0.039\" L x 0.020\" W (1.00mm x 0.50mm)", Stock 1=2916495, Supplier=Digikey, Supplier 1=Digi-Key, Supplier Part Number 1=311-10.0KLRCT-ND
R2 R4 R5 R6: library part RMCF0402FT240R, "RES TF 240 OHM 1% 0.0625W 0402", Manufacturer="Stackpole Electronics Inc", Package / Case="0402 (1005 Metric)", Power (Watts)="0.063W, 1/16W", Resistance (Ohms)=240, Supplier Part Number=RMCF0402FT240RCT-ND, Temperature Coefficient=±100ppm/°C, Tolerance=±1%, .Checked PCB=used, .Checked SCH=used, Category=Resistors, ComponentLink1Description=http://www.seielect.com/Catalog/SEI-RMCF.pdf, ComponentLink1URL=http://www.seielect.com/Catalog/SEI-RMCF.pdf, Composition="Thick Film", Features=-, Height="0.016\" (0.40mm)", Manufacturer Part Number=RMCF0402FT240R, Number of Terminations=2, Packaging="Cut Tape (CT)", Price 1k [$]=0.00384, Pricing 1="1=0.04, 10=0.025, 50=0.0138, 100=0.0105, 250=0.0078, 500=0.00576, 1000=0.00384 (USD)", RoHS="RoHS Compliant", Size / Dimension="0.039\" L x 0.020\" W (1.00mm x 0.50mm)", Stock 1=39860, Supplier=Digikey, Supplier 1=Digi-Key, Supplier Part Number 1=RMCF0402FT240RCT-ND
R7: library part CRCW0402200RFKED, "RES 200 OHM 1/16W 1% 0402 SMD", Manufacturer="Vishay Dale", Package / Case="0402 (1005 Metric)", Power (Watts)="0.063W, 1/16W", Resistance (Ohms)=200, Supplier Part Number 1=541-200LCT-ND, Temperature Coefficient=±100ppm/°C, Tolerance=±1%, .Checked PCB="RF, used by MM", .Checked SCH="MM, checked by RF", .Creator=MM, Category=Resistors, ComponentLink1Description=http://www.vishay.com/doc?20035, ComponentLink1URL=http://www.vishay.com/doc?20035, Composition="Thick Film", Features="Automotive AEC-Q200 Qualified", Height="0.016\" (0.40mm)", Manufacturer Part Number=CRCW0402200RFKED, Number of Terminations=2, Packaging="Cut Tape (CT)", Pricing 1="10=0.083, 50=0.0444, 200=0.0255, 1000=0.0174 (USD)", RoHS="RoHS Compliant", Size / Dimension="0.039\" L x 0.020\" W (1.00mm x 0.50mm)", Stock 1=251574, Supplier 1=Digi-Key, Supplier Device Package="0402 (1005 Metric)"
U1: library part MCIMX6Q5EYM10AC, "IC MCU 32BIT ARM QUAD 624FCBGA", Manufacturer="Freescale Semiconductor", Operating Temperature="-20°C ~ 105°C", Package / Case="624-FBGA, FCBGA", Supplier Part Number 1=MCIMX6Q5EYM10AC-ND, Voltage - Supply (Vcc/Vdd)="0.925 V ~ 1.5 V", .Checked PCB="MM, checked by RF", .Checked SCH=MM, .Creator=MM, Category="Integrated Circuits (ICs)", ComponentLink1Description=http://cache.freescale.com/files/32bit/doc/data_sheet/IMX6DQCEC.pdf, ComponentLink1URL=http://cache.freescale.com/files/32bit/doc/data_sheet/IMX6DQCEC.pdf, Connectivity="CAN, EBI/EMI, ESAI, Ethernet, GPMI, I2C, MMC/SD, PCI, SATA, SPI, UART, USB, USB OTG", Core Processor="ARM® Cortex™-A9", Core Size="32-Bit Quad-Core", Data Converters=-, EEPROM Size=-, Manufacturer Part Number=MCIMX6Q5EYM10AE, Number of I /O=224, Oscillator Type=Internal, Packaging=Tray, Peripherals="DMA, HDMI, I2S/SSI/AC97, MIPI CSI, MIMI DSI, MIPI HIS, PWM, WDT", Pricing 1="1=54.98, 10=51.922, 25=48.868, 100=30.5424 (USD)", Program Memory Size=-, Program Memory Type="External Program Memory", RAM Size="256K x 8", RoHS="RoHS Compliant", Speed=1.0GHz, Stock 1=0, Supplier 1=Digi-Key
U2: "4Gb DDR3-1866 SDRAM, 256Mb x 16, 1.071ns, 1.5V, 0 to 95 degC, 96-Ball FBGA, Pb-Free", Manufacturer=Micron, Op. Temp.="0C to +95C", Package=FBGA, Voltage=1.5V, CL="CL = 13", Clock Rate="933 MHz", ComponentLink1Description="Manufacturer URL", ComponentLink1URL=http://www.micron.com/, ComponentLink2Description=Datasheet, ComponentLink2URL=http://www.micron.com/~/media/Documents/Products/Data%20Sheet/DRAM/4Gb_DDR3_SDRAM.pdf, ComponentLink3Description="Package Specification", ComponentLink3URL=http://www.micron.com/~/media/Documents/Products/Data%20Sheet/DRAM/4Gb_1_35V_DDR3L.pdf, Cycle Time=1.071ns, Data Rate=DDR3-1866, DatasheetVersion=Rev.J, Density=4Gb, Depth=256Mb, Mounting Technology="Surface Mount", PackageDescription="96-Ball Fine-Pitch Ball Grid Array, 14 x 9 mm, Pitch 0.8 mm", PackageReference=MICT-HA-96, PackageVersion=Rev.E, PartNumber=MT41J256M16HA-107, Pin Count=96-ball, RoHS=Yes, Width=x16

## Via types
v1: diameter 17.72, hole 7.87, Component Side to Solder Side, 131 vias

## Nets (pads, with @x,y where several pads share a name; then routed paths per layer and width w, separated by ;. In a path a pad name is that pad's centre, name@x,y a point inside that pad or via, vN(x,y) a via of type N, cw(c..) or ccw(c..) an arc to the next point about the centre after c; other vN are vias at no path point)
+1V5_DDR: C4.1 C6.1 C7.1 C8.1 C9.1 C10.1 C11.1 C12.1 C13.1 C14.1 C15.1 C16.1 C17.1 R4.2 U1.R18 U1.T18 U1.U18 U1.V9 U1.V10 U1.V11 U1.V12 U1.V13 U1.V14 U1.V15 U1.V16 U1.V17 U1.V18 U2.A1 U2.A8 U2.B2 U2.C1 U2.C9 U2.D2 U2.D9 U2.E9 U2.F1 U2.G7 U2.H2 U2.H9 U2.K2 U2.K8 U2.N1 U2.N9 U2.R1 U2.R9 | length 1255.6
  Component Side w8: v1(4296.48,2335.85) U2.A1@4318.35,2335.85 ; v1@4296.48,2556.32 U2.A8@4318.35,2556.32 ; v1@4334.21,2351.7 U2.B2@4349.85,2367.35 ; v1(4381.35,2285.21) U2.C1@4381.35,2335.85 ; U2.C9@4381.35,2587.82 v1(4381.35,2613.63) ; v1@4399.17,2353.67 U2.D2@4412.84,2367.35 ; U2.D9@4412.84,2587.82 v1@4412.84,2638.46 ; U2.E9@4444.34,2587.82 v1@4444.34,2613.63 ; v1@4475.83,2311.57 U2.F1@4475.83,2335.85 ; v1@4491.58,2540.57 U2.G7@4507.33,2524.83 ; v1@4523.18,2351.7 U2.H2@4538.83,2367.35 ; U2.H9@4538.83,2587.82 v1(4538.83,2638.46) ; U2.K2@4601.82,2367.35 v1@4618.11,2351.06 ; U2.K8@4603.57,2556.32 v1@4617.67,2570.43 ; v1(4696.31,2285.21) U2.N1@4696.31,2335.85 ; U2.N9@4696.31,2587.82 v1(4696.31,2637.25) ; v1(4759.3,2283.46) U2.R1@4759.3,2335.85 ; U2.R9@4759.84,2588.36 v1(4759.84,2639)
  Component Side w10: v1(4295.28,2555.12) v1@4296.48,2556.32 ; v1(4334.21,2350.83) v1@4334.21,2351.7 ; U2.B2@4349.85,2366.69 U2.B2@4349.85,2367.35 ; v1(4381.35,2285.21) 4395,2271.56 C7.1@4395,2245 ; v1(4381.35,2613.63) 4381.35,2646.35 4390,2655 C15.1@4390,2685.32 ; v1(4397.31,2352.69) 4397.31,2354.47 4397.84,2355 4399.17,2353.67 v1@4400.04,2352.8 ; v1@4412.84,2638.46 v1(4413.39,2639) ; C14.1@4430,2685.32 4430,2665.63 4444.34,2651.29 v1@4444.34,2613.63 ; C16.1@4475,2244.69 4475,2310.73 v1@4475.83,2311.57 ; v1@4491.58,2540.57 v1(4491.58,2541.45) ; C13.1@4509.69,2685 4509.69,2667.6 v1(4538.83,2638.46) ; v1(4523.18,2350.83) v1@4523.18,2351.7 ; U2.K8@4601.82,2556.32 U2.K8@4603.57,2556.32 ; v1@4617.04,2353 v1@4618.11,2351.93 ; v1@4617.67,2570.43 v1(4617.67,2571.3) ; C9.1@4694.69,2245 4694.69,2283.59 v1(4696.31,2285.21) ; v1(4696.31,2637.25) 4710.32,2651.26 C11.1@4710.32,2685 ; v1(4759.3,2283.46) 4765.32,2277.45 C8.1@4765.32,2245 ; U2.R9@4759.3,2587.82 U2.R9@4759.84,2588.36 ; v1(4759.84,2639) 4790.32,2669.47 C12.1@4790.32,2685 ; C4.1@4943.92,2258.92 v1(4960,2242.84) 4973.92,2228.92 R4.2@4978.92,2228.92 ; v1@4618.11,2351.93 4617.67,2351.49 v1(4617.67,2350.83) 4617.89,2350.83 4618.11,2351.06 v1@4618.11,2351.93
  Solder Side w10: v1(4296.48,2335.85) 4298.02,2334.31 C10.1@4298.02,2305 ; C6.1@4958.04,2208.04 4958.04,2240.88 v1(4960,2242.84)
  other v1: 4476.38,2311.02 4444.88,2614.17
+DDR_VREF: C1.1 C2.1 C3.1 C4.2 C5.1 R4.1 R5.2 U1.AC2 U2.H1 U2.M8 | length 339.3
  Component Side w6: v1(3858.27,2555.12) U1.AC2@3874.02,2570.87
  Component Side w8: U2.H1@4538.83,2335.85 4538.83,2315.83 v1(4534,2311) 4540.32,2304.68 C2.1@4540.32,2245 ; U2.M8@4664.81,2557.2 v1(4680.56,2572.94)
  Component Side w10: U2.M8@4664.81,2556.32 U2.M8@4664.81,2557.2 ; v1(4860,2230) 4860,2229.16 4887.34,2201.82 4887.34,2200.5 R5.2@4918.92,2168.92 ; v1(4885,2260) 4886.62,2260 4945.54,2201.08 R4.1@4951.08,2201.08
  Solder Side w10: C3.1@4669.29,2555.12 4680.56,2566.38 v1(4680.56,2572.94)
DRAM_A0: U1.AC14 U2.N3 | length 2134.4
  Component Side w4.5: U1.AC14@3874.02,2948.82 3889.77,2964.57 3976.38,2964.57 3992.13,2948.82 v1(4007.87,2948.82) ; U2.N3@4696.31,2398.84 4710.76,2413.3 4740.15,2413.3 4830.16,2503.31 v1(4830.16,2537)
  Solder Side w4.5: v1(4007.87,2948.82) 4891.18,2948.82 4915,2925 4915,2855 4911.75,2851.75 4857.68,2851.75 4854,2848.07 4854,2830.93 4857.68,2827.25 4911.32,2827.25 4915,2823.57 4915,2815 4915,2810 4915,2805.43 4911.32,2801.75 4857.68,2801.75 4854,2798.07 4854,2780.93 4857.68,2777.25 4911.32,2777.25 4915,2773.57 4915,2765 4915,2750.43 4911.32,2746.75 4857.68,2746.75 4854,2743.07 4854,2725.93 4857.68,2722.25 4911.32,2722.25 4915,2718.57 4915,2710 4915,2700 4910,2695 4870,2695 4855,2680 4855,2510 4850,2505 4835.16,2505 4830.16,2510 v1(4830.16,2537)
DRAM_A1: U1.AB14 U2.P7 | length 2142.1
  Component Side w4.5: U1.AB14@3842.52,2948.82 v1(3858.27,2964.57) ; v1(4712.59,2507.87) 4729.55,2524.83 U2.P7@4727.8,2524.83
  Solder Side w4.5: v1(3858.27,2964.57) 4007.87,2964.57 4020,2964.57 4025.43,2970 4895,2970 4935,2930 4935,2685 4931.75,2681.75 4886.45,2681.75 4882.77,2678.07 4882.77,2660.93 4886.45,2657.25 4931.32,2657.25 4935,2653.57 4935,2645 4935,2635.43 4931.32,2631.75 4877.68,2631.75 4874,2628.07 4874,2610.93 4877.68,2607.25 4931.32,2607.25 4935,2603.57 4935,2595 4935,2585 4931.75,2581.75 4877.68,2581.75 4874,2578.07 4874,2560.93 4877.68,2557.25 4931.32,2557.25 4935,2553.57 4935,2545 4925,2535 4881,2535 4875,2529 4875,2495 4870,2490 4815,2490 4810,2495 4810,2511.2 4803.2,2518 4742.41,2518 4732.28,2507.87 v1(4712.59,2507.87)
DRAM_A2: U1.AA14 U2.P3 | length 1870.1
  Component Side w4.5: U1.AA14@3811.03,2948.82 v1(3826.77,2933.07) ; U2.P3@4727.8,2398.84 4727.8,2398.18 v1(4740.15,2385.82)
  Solder Side w4.5: v1(3826.77,2933.07) 3811.03,2917.32 3800.32,2917.32 3762,2879 3762,2373 3940,2195 4535,2195 4571,2231 4571,2344.83 4570.63,2345.2 4570.63,2388.62 4582.01,2400 4653.12,2400 4654.39,2398.73 4699.73,2398.73 4700.9,2399.9 4721.71,2399.9 4721.81,2400 4725.97,2400 v1(4740.15,2385.82)
DRAM_A3: U1.Y14 U2.N2 | length 2137.4
  Component Side w4.5: v1(3700,2933) 3701,2932 3762.71,2932 U1.Y14@3779.53,2948.82 ; v1(4680.56,2350.72) 4680.56,2351.6 U2.N2@4696.31,2367.35
  Solder Side w4.5: v1(3700,2933) 3687,2920 3687,2323 3920,2090 4640,2090 4720,2170 4720,2235 4715,2240 4699.67,2240 4694.68,2244.99 4694.68,2259.37 4700.31,2265 4714.68,2265 4720,2270.32 4720,2293 4712.91,2300.09 4712.91,2342.09 4704.28,2350.72 v1(4680.56,2350.72)
DRAM_A4: U1.W14 U2.P8 | length 1366.2
  Component Side w4.5: U1.W14@3748.03,2948.82 3763.21,2964 v1(3795,2964) ; U2.P8@4727.8,2556.32 4740.81,2569.34 v1(4740.81,2570.21)
  Solder Side w4.5: v1(3795,2964) 3807.87,2964 3823.05,2948.82 3834.96,2948.82 3842.83,2940.94 3842.83,2926.68 3854.28,2915.23 3894.63,2915.23 3896.73,2917.32 3956.69,2917.32 3999.02,2875 4730,2875 4743.78,2861.22 4743.78,2573.18 v1(4740.81,2570.21)
DRAM_A5: U1.AE13 U2.P2 | length 1985.7
  Component Side w4.5: v1(3921.26,2901.57) U1.AE13@3937.01,2917.32 ; v1(4714,2382) 4714,2380.49 4727.8,2366.69 U2.P2@4727.8,2367.35
  Solder Side w4.5: v1(3921.26,2901.57) 3870.08,2901.57 3866.14,2905.51 3805.51,2905.51 3778,2878 3778,2382 3945,2215 4529.96,2215 4561,2246.04 4561,2391.47 4578.42,2408.9 4657.27,2408.9 4658.6,2407.56 4671.4,2407.56 4672.66,2408.83 4697.85,2408.83 4697.95,2408.73 4718.05,2408.73 4718.15,2408.83 4748.65,2408.83 4755.91,2401.57 4755.91,2379.29 4747,2370.38 4728.62,2370.38 4717,2382 v1(4714,2382)
DRAM_A6: U1.AC13 U2.R8 | length 1256
  Component Side w4.5: U1.AC13@3874.02,2917.32 3887.36,2930.66 v1(3888.23,2930.66) ; U2.R8@4759.3,2556.32 4759.3,2558.51 4771,2570.21 v1(4772.31,2570.21)
  Solder Side w4.5: v1(3888.23,2930.66) 3961.34,2930.66 3997,2895 4755,2895 4775.59,2874.41 4775.59,2573.49 v1(4772.31,2570.21)
DRAM_A7: U1.Y13 U2.R2 | length 2138.5
  Component Side w4.5: v1(3670.17,2901.57) 3763.47,2901.57 3763.62,2901.42 U1.Y13@3779.53,2917.32 ; U2.R2@4759.3,2367.35 4759.3,2366.69 4775.05,2350.94 v1(4775.05,2350.72)
  Solder Side w4.5: v1(3670.17,2901.57) 3670.17,2314.83 3915,2070 4648,2070 4743.78,2165.78 4743.78,2319.46 v1(4775.05,2350.72)
DRAM_A8: U1.AB13 U2.T8 | length 1345.8
  Component Side w4.5: U1.AB13@3842.52,2917.32 v1(3858.27,2933.07) ; U2.T8@4790.79,2556.32 4792.54,2556.32 v1(4807.09,2570.87)
  Solder Side w4.5: v1(3858.27,2933.07) 3868.81,2933.07 3881.84,2946.1 3964.9,2946.1 3996,2915 4790,2915 4806.78,2898.22 4806.78,2571.18 v1(4807.09,2570.87)
DRAM_A9: U1.AE12 U2.R3 | length 1927.3
  Component Side w4.5: U1.AE12@3937.01,2885.83 v1(3960.63,2885.83) ; U2.R3@4759.3,2398.84 4773.52,2384.63 v1(4773.52,2383.75)
  Solder Side w4.5: v1(3960.63,2885.83) 3883.68,2885.83 3874.02,2876.17 3874.02,2863.99 3864.66,2854.64 3851.87,2854.64 3851.51,2855 3850,2855 3842.83,2862.17 3842.83,2875.86 3833.17,2885.52 3820.38,2885.52 3807,2872.14 3807,2403 3955,2255 4505,2255 4523.62,2273.62 4523.62,2293.38 4517.57,2299.43 4517.57,2323.38 4538.83,2344.64 4538.83,2408.9 4568.36,2438.44 4675.56,2438.44 4696.34,2417.66 4701.5,2417.66 4701.6,2417.56 4714.4,2417.56 4714.5,2417.66 4759.5,2417.66 4773.52,2403.65 v1(4773.52,2383.75)
DRAM_A10: U1.AA15 U2.L7 | length 2139.2
  Component Side w4.5: U1.AA15@3811.03,2980.31 v1(3826.77,2996.06) ; v1(4618.11,2484.25) 4633.31,2499.46 U2.L7@4633.31,2524.83
  Solder Side w4.5: v1(3826.77,2996.06) 3842.83,2980.01 4000,2980.01 4009.99,2990 4900,2990 4955,2935 4955,2550 4955,2525.43 4951.32,2521.75 4899.24,2521.75 4895.57,2518.07 4895.57,2500.93 4899.24,2497.25 4951.32,2497.25 4955,2493.57 4955,2485 4955,2480 4949.77,2474.77 4627.59,2474.77 v1(4618.11,2484.25)
DRAM_A11: U1.AC12 U2.R7 | length 1320.2
  Component Side w4.5: U1.AC12@3874.02,2885.83 v1(3889.76,2870.08) ; U2.R7@4759.3,2524.83 4759.3,2500.54 v1(4759.84,2500)
  Solder Side w4.5: v1(3889.76,2870.08) 3921.26,2838.58 4651.42,2838.58 4685,2805 4685,2691.89 4633.11,2640 4633.11,2515.03 4655.71,2492.43 4752.27,2492.43 v1(4759.84,2500)
DRAM_A12: U1.AD12 U2.N7 | length 1159.7
  Component Side w4.5: U1.AD12@3905.51,2885.83 v1(3921.26,2870.08) ; U2.N7@4696.31,2524.83 4698.06,2524.83 4712.6,2539.37 v1(4712.16,2539.81) ; v1(4712.16,2539.81) 4711.29,2540.68 4708.67,2543.3 v1(4712.16,2539.81)
  Solder Side w4.5: v1(3921.26,2870.08) 3974.92,2870.08 3990.67,2854.33 4665.67,2854.33 4715,2805 4715,2670 4720,2665 4720,2627.66 4696.72,2604.38 4696.72,2553.02 v1@4711.05,2538.69
DRAM_A13: U1.AC17 U2.T3 | length 2136.7
  Component Side w4.5: U1.AC17@3874.02,3043.31 v1(3889.76,3059.06) ; U2.T3@4790.79,2398.84 4822,2398.84 v1(4822,2400)
  Solder Side w4.5: v1(3889.76,3059.06) 3920.71,3090 5030,3090 5071,3049 5071,2446 5025,2400 v1(4822,2400)
DRAM_A14: U1.AA12 U2.T7 | length 1630.4
  Component Side w4.5: U1.AA12@3811.03,2885.83 v1(3826.77,2870.08) ; U2.T7@4790.79,2524.83 4790.79,2500.54 v1(4791.34,2500)
  Solder Side w4.5: v1(3826.77,2870.08) 3826.77,2860.23 3864.17,2822.83 4592.17,2822.83 4605,2810 4605,2725 4610,2720 4620,2720 4625,2725 4625,2815 4630,2820 4645,2820 4650,2815 4650,2705 4645,2700 4605,2700 4600.74,2695.74 4600.74,2564.26 4610,2555 4610,2520 4646.4,2483.6 4774.94,2483.6 v1(4791.34,2500)
DRAM_CAS_B: U1.AE16 U2.K3 | length 2135.5
  Component Side w4.5: U1.AE16@3937.01,3011.81 3955,3029.8 v1(3955,3030) ; U2.K3@4601.82,2398.84 4647.98,2445 4700,2445 4710,2435 v1(4710,2433.1)
  Solder Side w4.5: v1(3955,3030) 3955.2,3030 3975.2,3050 4985,3050 5027.56,3007.44 5027.56,2456.69 5003.97,2433.1 v1(4710,2433.1)